# EAGLE board design1 (EAGLE 7.3.0)
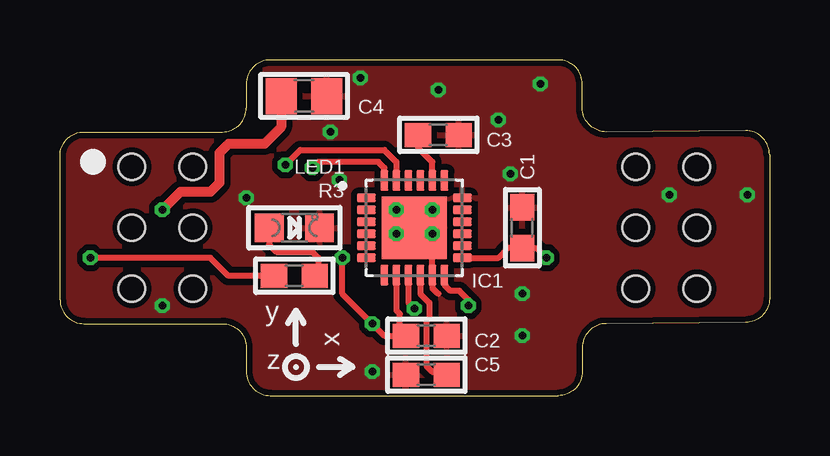
[diagram p0: board, top side]
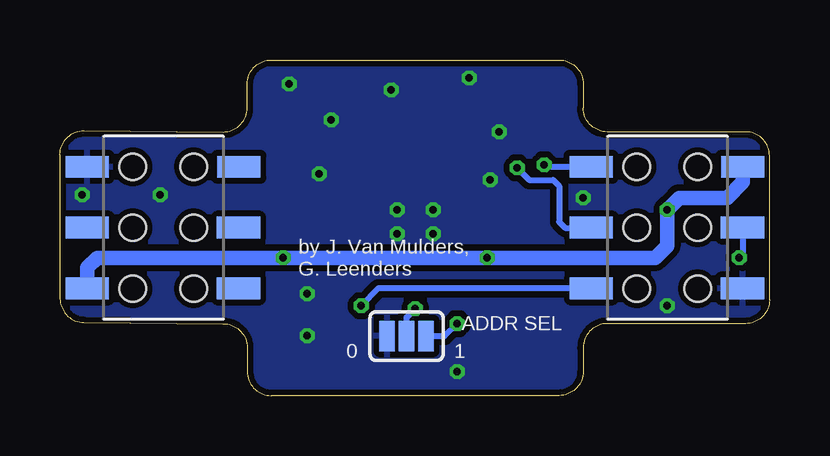
[diagram p1: board, bottom side, seen from below]

Size 29.57 x 14 mm. Coordinates in mm from the lower left corner, seen from the top.
Outline: 0,4 0,10 arc-90 1,11 6.76,11 arc90 7.76,12 7.76,13 arc-90 8.77,14 20.77,14 arc-90 21.77,13 21.77,12 arc90 22.77,11 28.57,11.05 arc-90 29.57,10.05 29.57,4.05 arc-90 28.57,3.05 22.77,3 arc90 21.77,2 21.77,1 arc-90 20.77,0 8.77,0 arc-90 7.76,1 7.76,2 arc90 6.76,3 1,3 arc-90 0,4
Copper layers (1*16): Top 0.035mm / dielectric 1.5mm / Bottom 0.035mm
Design rules "SeeedStudio_2layer_DRU_no_angle_20140221": minimum track width 6mil, minimum drill 12mil, track to track 6mil, track to pad 6mil, pad to pad 6mil, via to via 6mil, smd to smd 0mil, copper to edge 10mil, drill to drill 10mil, minimum pad ring 10mil, minimum via ring 6mil, stop-mask expansion 2mil, vias tented up to drill 100mil, thermal gap 10mil

## Footprints (pad centres in the part's own frame; a part is rotated, then mirrored left to right if it is on the bottom)
0603 = smd 1.1 x 1: 1 -0.85,0; 2 0.85,0
0805 = smd 1.3 x 1.5: 1 -0.95,0; 2 0.95,0
IC_MPU6050 = smd 0.8 x 0.34: 1 -2,1.25; 2 -2,0.75; 3 -2,0.25; 4 -2,-0.25; 5 -2,-0.75; 6 -2,-1.25; 13 2,-1.25; 14 2,-0.75; 15 2,-0.25; 16 2,0.25; 17 2,0.75; 18 2,1.25 | smd 0.34 x 0.85: 7 -1.25,-1.975; 8 -0.75,-1.975; 9 -0.25,-1.975; 10 0.25,-1.975; 11 0.75,-1.975; 12 1.25,-1.975; 19 1.25,1.975; 20 0.75,1.975; 21 0.25,1.975; 22 -0.25,1.975; 23 -0.75,1.975; 24 -1.25,1.975 | smd 2.7 x 2.6: 25 0,0
SMT-JUMPER_3_NO_SILK = smd 0.635 x 1.27: 1 -0.813,0; 2 0,0; 3 0.813,0
610006243021 = smd 0.9 x 1.8: 1 -2.54,3.15; 2 -0.01,3.14; 3 2.53,3.14; 4 2.53,-3.16; 5 -0.01,-3.16; 6 -2.54,-3.17 | hole 1.1: -2.54,1.27; 0,1.27; 0,-1.27; -2.54,-1.27; 2.54,1.27; 2.54,-1.27
CHIPLED_0805 = smd 1.2 x 1.2: A 0,-1.05; C 0,1.05

## Placement (x,y rotation side)
C1  100n  [0603]  19.27,7 90 top
C2  10n  [0603]  15.27,2.5 0 top
C3  2200p  [0603]  15.77,10.88 0 top
C4  10u  [0805]  10.17,12.5 0 top
C5  100n  [0603]  15.27,0.88 180 top
IC1  MPU6050  [IC_MPU6050]  14.77,7 0 top
JP1  JUMPER-SMT_3_NO_SILK  [SMT-JUMPER_3_NO_SILK]  15.12,2.48 0 bottom
K1  610006243021  [610006243021]  4.26,7 270 bottom
K2  610006243021  [610006243021]  25.27,7 270 bottom
LED1  [CHIPLED_0805]  9.77,7 270 top
R3  470  [0603]  9.77,5 180 top

## Library data of the parts
C1-C5 LED1 R3 = microbuilder
IC1 = MPU6050; AVAILABILITY: Unavailable; DESCRIPTION: MPU6050 Arduino IDE Wheeled Robotics Kit; MF: TDK InvenSense; MP: MPU6050; PACKAGE: VFQFN-24 TDK InvenSense; PRICE: None
JP1 = SparkFun-Jumpers
K1 K2 = Wurth_Elektronik_Electromechanic_Board_to_Board_Connectors_rev15c

## Nets
A0: K2.5
CLKIN: IC1.1
D0: K1.2 R3.2
GND: C1.2 C2.2 C3.2 C4.2 C5.2 IC1.11 IC1.18 IC1.25 JP1.1 K1.3 K2.6 LED1.C
INT: IC1.12 K1.4
N$1: C3.1 IC1.20
N$2: C5.1 IC1.10
N$3: LED1.A R3.1
N$4: IC1.9 JP1.2
N$5: C1.1 C2.1 C4.1 IC1.8 IC1.13 JP1.3 K1.1 K2.4
RX: K2.2
SCL: IC1.23 K1.6
SDA: IC1.24 K1.5
TX: K2.1

## Tracks (layer width: path | path; a pad name or v marks a point on that pad's centre or on a via)
D0  (via drill 0.31)
  Top 0.254: R3.2 7.01,5 6.26,5.75 v1.27,5.75
  Bottom 0.254: K1.2 1.12,5.86 v1.27,5.75
GND  (via drill 0.31)
  Top 0.254: 15.77,4.25 15.52,4.5 IC1.11 v15.52,6.75 IC1.25
  other vias: 14.02,7.75 15.52,7.75 14.02,6.75 12.52,13.25 20.02,13 15.77,12.75 4.26,3.75 28.64,8.38 18.77,9.25 18.27,11.5 19.27,4.25 13.02,1 11.27,11 7.76,8.25 19.27,2.5 25.39,8.38 11.64,9
  pour Bottom (isolate 0.254): -4.24,17 33.52,17 33.52,-3.75 -4.24,-3.75
  pour Top (isolate 0.254): -4.49,18.75 36.02,18.75 36.02,-4.75 -3.98,-4.75 arc-90 -4.49,-4.25
INT  (via drill 0.31)
  Top 0.254: v17.02,3.75 17.02,4 16.64,4.38 16.27,4.38 16.02,4.62 IC1.12
  Bottom 0.254: K1.4 16.3,4.47 v17.02,3.75
N$1
  Top 0.254: IC1.20 15.52,9.75 14.92,10.35 C3.1
N$2
  Top 0.254: IC1.10 15.02,4.25 15.39,3.88 15.39,3.25 15.27,3.12 15.27,1.25 15.52,1 C5.1
N$3
  Top 0.254: LED1.A 8.71,6.3 9.02,6 10.52,6 10.77,5.75 10.77,5.15 R3.1
N$4  (via drill 0.31)
  Top 0.254: IC1.9 14.52,3.88 v14.77,3.62
  Bottom 0.254: JP1.2 15.12,3.27 v14.77,3.62
N$5  (via drill 0.31)
  Top 0.254: IC1.13 18.27,5.75 18.66,6.15 C1.1 19.87,6.15 v20.27,5.75 | IC1.8 14.02,3.55 14.17,3.4 14.17,2.85 14.27,2.75 C2.1 13.52,2.5 v13.02,3 11.77,4.25 v11.77,5.75
  Top 0.406: C4.1 9.21,11.2 8.52,10.5 7.01,10.5 6.64,10.12 6.64,8.88 6.26,8.5 5.01,8.5 v4.26,7.75
  Bottom 0.254: JP1.3 13.54,2.48 v13.02,3
  Bottom 0.61: K1.1 1.12,8.9 1.77,8.25 3.77,8.25 v4.26,7.75 4.26,6.25 4.76,5.75 v11.77,5.75 v20.27,5.75 28.02,5.75 28.43,5.34 K2.4
SCL  (via drill 0.31)
  Top 0.254: v9.39,9.62 10.02,10.25 13.52,10.25 14.02,9.75 IC1.23
  Bottom 0.254: K1.6 9.3,9.54 v9.39,9.62
SDA  (via drill 0.31)
  Top 0.254: IC1.24 13.52,9.5 13.27,9.75 10.77,9.75 v10.52,9.5
  Bottom 0.254: v10.52,9.5 10.02,9 9.02,9 8.77,8.75 8.77,7.25 8.52,7 K1.5

## Text on the board
bPlace: by J. Van Mulders, / G. Leenders
tNames: y | x | z
bNames: ADDR SEL | 1 | 0
bStop: CONTROLLER